# Altium PCB NTC_6_Shoulder.PcbDoc
Units mm, origin at the board's own origin, x right, y up, seen from the top; angles counter-clockwise.
Board outline 174 x 10 mm, 2 copper layers (Top Layer, Bottom Layer); 24 components, 12 nets, 24 pads, 0 vias.
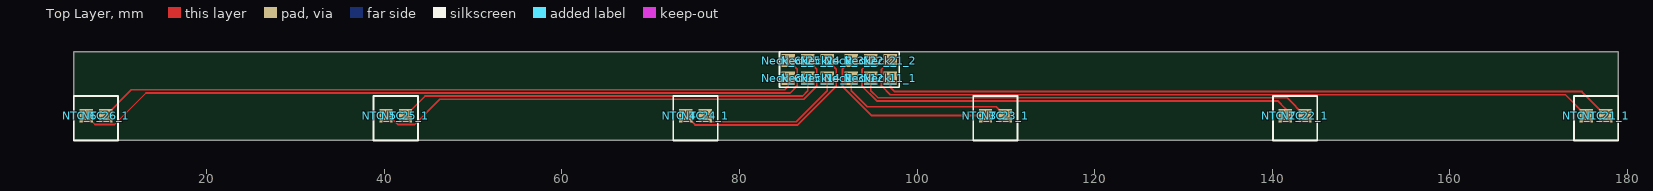
[diagram p0: Top Layer view]
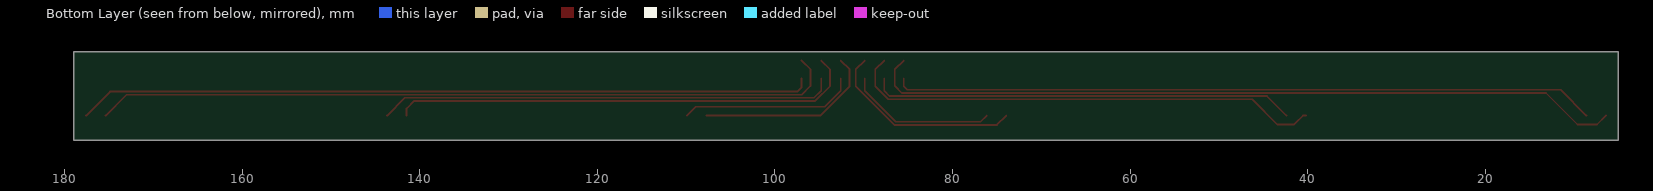
[diagram p1: Bottom Layer view, seen from below]

## Layer stack, top to bottom
Top Solder: solder mask 0.0102, Solder Resist, Dk 3.5
Top Layer: signal copper 0.035
Dielectric 1: dielectric 0.32, FR-4, Dk 4.8
Bottom Layer: signal copper 0.035
Bottom Solder: solder mask 0.0102, Solder Resist, Dk 3.5

## Board outline
5,5 179,5 179,15 5,15

## Design rules (kind name [scope] priority, off if disabled: settings)
Clearance [All] p1: gap=0.15 ignorepadtopadclearanceinfootprint=FALSE except(0: Arc-Hole Track-Hole SMDPad-Hole THPad-Hole Via-Hole Fill-Hole Poly-Hole Region-Hole Text-Hole)
PolygonConnect [All] p1: connectstyle=Relief reliefconductorwidth=0.254 reliefentries=4 polygonreliefangle="90 Angle" airgapwidth=0.254
RoutingVias [All] p1: holewidth=0.5 width=1 viastyle="Through Hole" minholewidth=0.3 minwidth=0.45 maxholewidth=6.3 maxwidth=10
SolderMaskExpansion [All] p1: expansion=0.102 istentingtop=FALSE
Width [All] p1: maxlimit=5 minlimit=0.15 preferedwidth=0.25 minimp=50.000000 maximp=50.000000 favimp=50.000000
30 further rules are at their usual default settings.

## Components (designator, comment, footprint, x,y, rotation, side; value= is the part's Value field where it differs from the comment)
Neck_1_1 "Pad" Generic_Pad_1.5x1.5#1 105,7 r90 top
Neck_1_2 "Pad" Generic_Pad_1.5x1.5#2 101,12 r90 top
Neck_2_1 "Pad" Generic_Pad_1.5x1.5#3 101,7 r90 top
Neck_2_2 "Pad" Generic_Pad_1.5x1.5#4 96,12 r90 top
Neck_3_1 "Pad" Generic_Pad_1.5x1.5#5 96,9 r90 top
Neck_3_2 "Pad" Generic_Pad_1.5x1.5#6 92,12 r90 top
Neck_4_1 "Pad" Generic_Pad_1.5x1.5#7 92,8 r90 top
Neck_4_2 "Pad" Generic_Pad_1.5x1.5#8 88,13 r90 top
Neck_5_1 "Pad" Generic_Pad_1.5x1.5#9 88,8 r90 top
Neck_5_2 "Pad" Generic_Pad_1.5x1.5#10 84,13 r90 top
Neck_6_1 "Pad" Generic_Pad_1.5x1.5#11 83,8 r90 top
Neck_6_2 "Pad" Generic_Pad_1.5x1.5#12 80,13 r90 top
NTC_1_1 "Pad" Generic_Pad_1.5x1.5#13 131,6 r90 top
NTC_1_2 "Pad" Generic_Pad_1.5x1.5#14 119,6 r90 top
NTC_2_1 "Pad" Generic_Pad_1.5x1.5#15 107,6 r90 top
NTC_2_2 "Pad" Generic_Pad_1.5x1.5#16 95,6 r90 top
NTC_3_1 "Pad" Generic_Pad_1.5x1.5#17 84,6 r90 top
NTC_3_2 "Pad" Generic_Pad_1.5x1.5#18 72,6 r90 top
NTC_4_1 "Pad" Generic_Pad_1.5x1.5#19 59,6 r90 top
NTC_4_2 "Pad" Generic_Pad_1.5x1.5#20 47,6 r90 top
NTC_5_1 "Pad" Generic_Pad_1.5x1.5#21 35,6 r90 top
NTC_5_2 "Pad" Generic_Pad_1.5x1.5#22 21,6 r90 top
NTC_6_1 "Pad" Generic_Pad_1.5x1.5#23 10,6 r90 top
NTC_6_2 "Pad" Generic_Pad_1.5x1.5#24 6,6 r90 top

## Footprints (in the part's own frame and the unit in brackets; to place one, negate y for a bottom-side part, rotate by r counter-clockwise, add the part's x,y. Pads: shape width x height; smd on the part's side, far side on the other; paste and mask are expansions set on the pad)
Generic_Pad_1.5x1.5#1 [mm] "1.5mm x 1.5mm Pad"
  rect 1.5x1.5 smd: P(5,8)
Generic_Pad_1.5x1.5#2 [mm] "1.5mm x 1.5mm Pad"
  rect 1.5x1.5 smd: P(2,4)
Generic_Pad_1.5x1.5#3 [mm] "1.5mm x 1.5mm Pad"
  rect 1.5x1.5 smd: P(5,6.2)
Generic_Pad_1.5x1.5#4 [mm] "1.5mm x 1.5mm Pad"
  rect 1.5x1.5 smd: P(2,1.2)
Generic_Pad_1.5x1.5#5 [mm] "1.5mm x 1.5mm Pad"
  rect 1.5x1.5 smd: P(3,3.4)
Generic_Pad_1.5x1.5#6 [mm] "1.5mm x 1.5mm Pad"
  rect 1.5x1.5 smd: P(2,-0.6)
Generic_Pad_1.5x1.5#7 [mm] "1.5mm x 1.5mm Pad"
  rect 1.5x1.5 smd: P(4,2.1)
Generic_Pad_1.5x1.5#8 [mm] "1.5mm x 1.5mm Pad"
  rect 1.5x1.5 smd: P(1,-1.9)
Generic_Pad_1.5x1.5#9 [mm] "1.5mm x 1.5mm Pad"
  rect 1.5x1.5 smd: P(4,0.3)
Generic_Pad_1.5x1.5#10 [mm] "1.5mm x 1.5mm Pad"
  rect 1.5x1.5 smd: P(1,-3.7)
Generic_Pad_1.5x1.5#11 [mm] "1.5mm x 1.5mm Pad"
  rect 1.5x1.5 smd: P(4,-2.5)
Generic_Pad_1.5x1.5#12 [mm] "1.5mm x 1.5mm Pad"
  rect 1.5x1.5 smd: P(1,-5.5)
Generic_Pad_1.5x1.5#13 [mm] "1.5mm x 1.5mm Pad"
  rect 1.5x1.5 smd: P(1.8,-46.6)
Generic_Pad_1.5x1.5#14 [mm] "1.5mm x 1.5mm Pad"
  rect 1.5x1.5 smd: P(1.8,-56.4)
Generic_Pad_1.5x1.5#15 [mm] "1.5mm x 1.5mm Pad"
  rect 1.5x1.5 smd: P(1.8,-36.696)
Generic_Pad_1.5x1.5#16 [mm] "1.5mm x 1.5mm Pad"
  rect 1.5x1.5 smd: P(1.8,-46.496)
Generic_Pad_1.5x1.5#17 [mm] "1.5mm x 1.5mm Pad"
  rect 1.5x1.5 smd: P(1.8,-25.922)
Generic_Pad_1.5x1.5#18 [mm] "1.5mm x 1.5mm Pad"
  rect 1.5x1.5 smd: P(1.8,-35.722)
Generic_Pad_1.5x1.5#19 [mm] "1.5mm x 1.5mm Pad"
  rect 1.5x1.5 smd: P(1.8,-17.148)
Generic_Pad_1.5x1.5#20 [mm] "1.5mm x 1.5mm Pad"
  rect 1.5x1.5 smd: P(1.8,-26.948)
Generic_Pad_1.5x1.5#21 [mm] "1.5mm x 1.5mm Pad"
  rect 1.5x1.5 smd: P(1.8,-7.374)
Generic_Pad_1.5x1.5#22 [mm] "1.5mm x 1.5mm Pad"
  rect 1.5x1.5 smd: P(1.8,-19.174)
Generic_Pad_1.5x1.5#23 [mm] "1.5mm x 1.5mm Pad"
  rect 1.5x1.5 smd: P(1.8,1.4)
Generic_Pad_1.5x1.5#24 [mm] "1.5mm x 1.5mm Pad"
  rect 1.5x1.5 smd: P(1.8,-0.4)

## Part data
Neck_1_1 Neck_1_2 Neck_2_1 Neck_2_2 Neck_3_1 Neck_3_2 Neck_4_1 Neck_4_2 Neck_5_1 Neck_5_2 Neck_6_1 Neck_6_2 NTC_1_1 NTC_1_2 NTC_2_1 NTC_2_2 NTC_3_1 NTC_3_2 NTC_4_1 NTC_4_2 NTC_5_1 NTC_5_2 NTC_6_1 NTC_6_2: library part Generic_Pad_1.5x1.5, "Pad 1.5mm x 1.5mm"

## Nets (pads, with @x,y where several pads share a name; then routed paths per layer and width w, separated by ;. In a path a pad name is that pad's centre, name@x,y a point inside that pad or via, vN(x,y) a via of type N, cw(c..) or ccw(c..) an arc to the next point about the centre after c; other vN are vias at no path point)
NetNeck_1_1_P: Neck_1_1.P NTC_1_1.P | length 82.9
  Top Layer w0.2: Neck_1_1.P 97,11 97.5,10.5 174.9,10.5 NTC_1_1.P
NetNeck_1_2_P: Neck_1_2.P NTC_1_2.P | length 84.1
  Top Layer w0.2: Neck_1_2.P 96,13 96,11.146 96.996,10.15 173.05,10.15 NTC_1_2.P
NetNeck_2_1_P: Neck_2_1.P NTC_2_1.P | length 51.5
  Top Layer w0.2: Neck_2_1.P 94.8,10.6 95.6,9.8 141.696,9.8 NTC_2_1.P
NetNeck_2_2_P: Neck_2_2.P NTC_2_2.P | length 52.8
  Top Layer w0.2: Neck_2_2.P 93.8,13 93.8,11.105 95.455,9.45 140.65,9.45 141.496,8.604 NTC_2_2.P
NetNeck_3_1_P: Neck_3_1.P NTC_3_1.P | length 19.9
  Top Layer w0.2: Neck_3_1.P 92.6,10.6 94.4,8.8 108.922,8.8 NTC_3_1.P
NetNeck_3_2_P: Neck_3_2.P NTC_3_2.P | length 20.8
  Top Layer w0.2: Neck_3_2.P 91.6,13 91.6,11.105 94.905,7.8 NTC_3_2.P
NetNeck_4_1_P: Neck_4_1.P NTC_4_1.P | length 16.9
  Top Layer w0.2: NTC_4_1.P 76.848,7.1 86.4,7.1 89.9,10.6 Neck_4_1.P
NetNeck_4_2_P: Neck_4_2.P NTC_4_2.P | length 22.5
  Top Layer w0.2: NTC_4_2.P 74.998,6.75 86.545,6.75 90.9,11.105 90.9,13 Neck_4_2.P
NetNeck_5_1_P: Neck_5_1.P NTC_5_1.P | length 47.9
  Top Layer w0.2: NTC_5_1.P 44.574,10 87.1,10 87.7,10.6 Neck_5_1.P
NetNeck_5_2_P: Neck_5_2.P NTC_5_2.P | length 54
  Top Layer w0.2: NTC_5_2.P 40.52,7.8 41.372,6.948 41.52,6.8 43.4,6.8 46.25,9.65 87.245,9.65 88.7,11.105 88.7,13 Neck_5_2.P
NetNeck_6_1_P: Neck_6_1.P NTC_6_1.P | length 79.2
  Top Layer w0.2: NTC_6_1.P 11.5,10.7 85.1,10.7 85.5,11.1 Neck_6_1.P
NetNeck_6_2_P: Neck_6_2.P NTC_6_2.P | length 85.6
  Top Layer w0.2: NTC_6_2.P 7.4,6.8 9.6,6.8 13.15,10.35 85.704,10.35 86.5,11.146 86.5,13 Neck_6_2.P

## Silkscreen, mask and mechanical layers (free items; w line width, h text height)
Top Overlay:
  lines w0.2: 5,5 10,5 10,10 5,10 5,5 ; 38.774,5 43.774,5 43.774,10 38.774,10 38.774,5 ; 72.548,5 77.548,5 77.548,10 72.548,10 72.548,5 ; 84.5,11 98,11 98,15 84.5,15 84.5,11 ; 106.322,5 111.322,5 111.322,10 106.322,10 106.322,5 ; 140.096,5 145.096,5 145.096,10 140.096,10 140.096,5 ; 174,5 179,5 179,10 174,10 174,5
Board Outline:
  the board outline again, w0.1